# Altium PCB EST_MainV20.PcbDoc (part 3 of 7)
Units mil, origin at the board's own origin, x right, y up, seen from the top; angles counter-clockwise.
Board outline 2745 x 4540 mil, 2 copper layers (Top Layer, Bottom Layer); 326 components, 241 nets, 1052 pads, 399 vias.
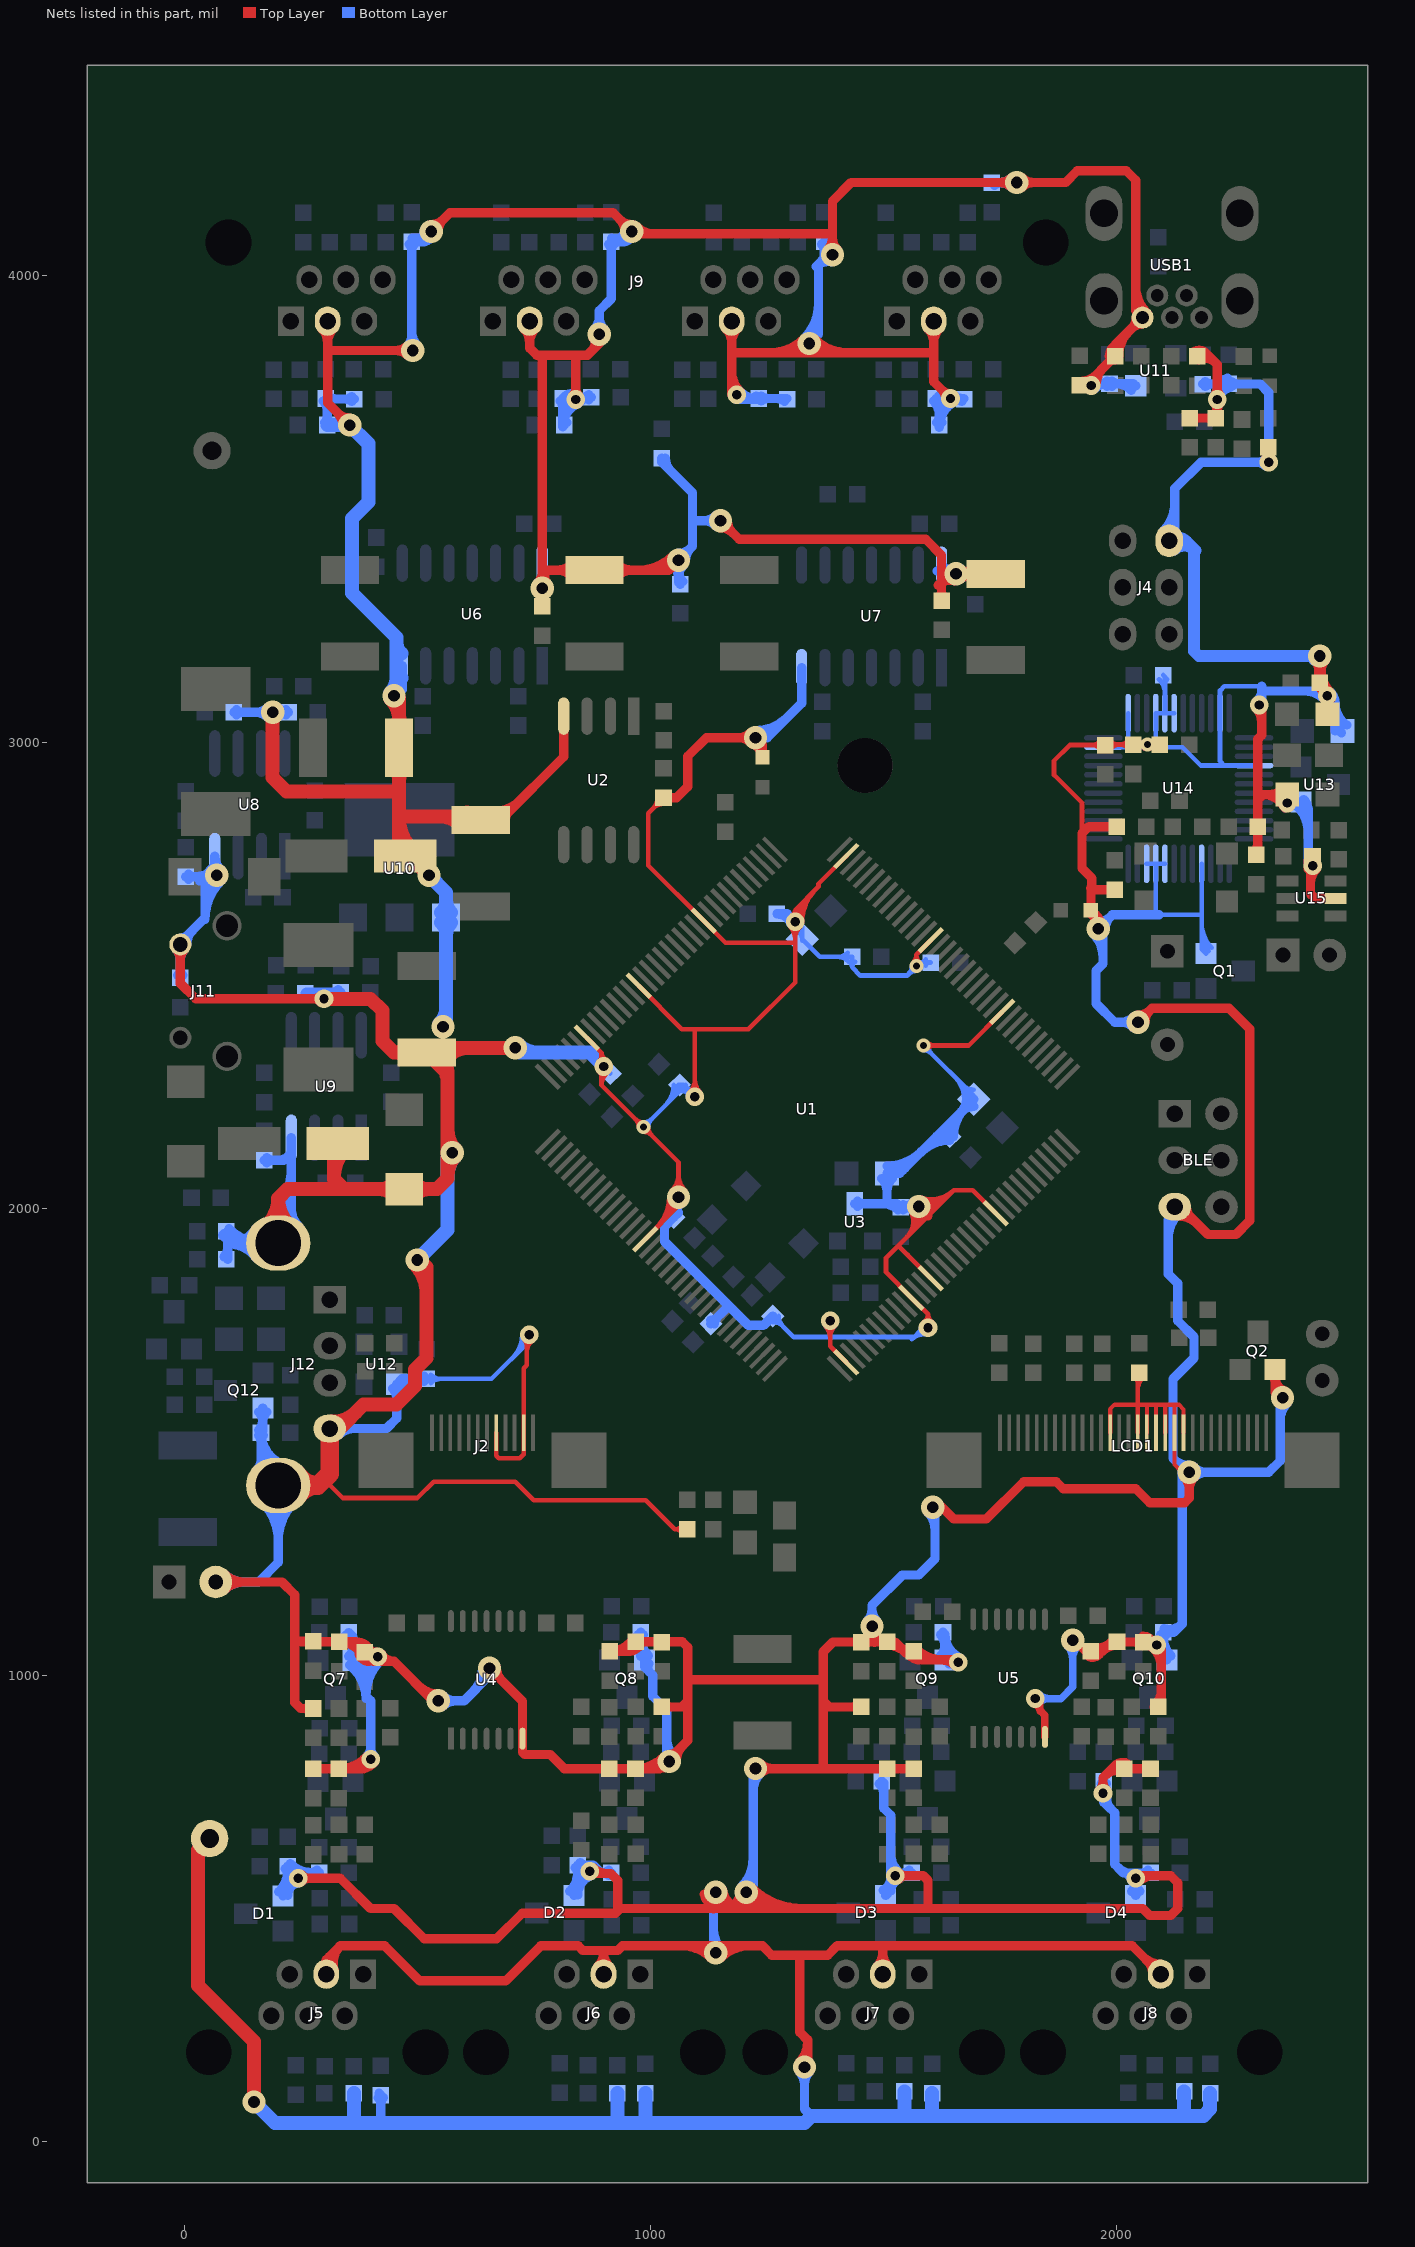
[diagram p3: the nets of this part, all layers, seen from the top]

## Via types
v1: diameter 30, hole 15, Top Layer to Bottom Layer, 237 vias
v2: diameter 50, hole 25, Top Layer to Bottom Layer, 93 vias
v3: diameter 40, hole 20, Top Layer to Bottom Layer, 68 vias
v4: diameter 60, hole 25, Top Layer to Bottom Layer, 1 vias

## Nets (pads, with @x,y where several pads share a name; then routed paths per layer and width w, separated by ;. In a path a pad name is that pad's centre, name@x,y a point inside that pad or via, vN(x,y) a via of type N, cw(c..) or ccw(c..) an arc to the next point about the centre after c; other vN are vias at no path point) (continued)
GND: BLE.5 C5.1 C6.1 C7.1 C8.1 C9.2 C10.1 C11.1 C12.1 C15.2 C16.2 C17.2 C18.2 C19.2 C20.2 C21.2 C22.2 C23.2 C24.2 C25.2 C26.2 C27.2 C28.2 C29.2 C30.2 C31.1 C32.1 C33.1 C34.1 C35.1 C36.1 C37.1 C38.1 C39.2 C40.1 C41.1 C42.1 C43.1 C44.1 C45.1 C46.1 C47.2 C48.1 C49.1 C50.1 C51.1 C52.1 C53.1 C54.1 C57.2 C58.2 C61.1 C62.1 C63.2 C64.1 C65.2 C66.1 C67.1 C68.2 C69.1 C70.2 C71.1 C72.1 C73.2 C74.1 C75.1 C76.1 C77.1 C78.1 C79.1 C80.1 C81.1 C83.2 C84.2 C85.2 D1.1 D2.1 D3.1 D4.1 D6.1 D12.2 D13.2 E1.2 E2.2 E3.2 E4.2 E5.2 E6.2 E7.2 J2.2 J2.5 J4.2 J5.3 J6.3 J7.3 J8.3 J9.3 J9.9 J9.15 J9.21 J10.2 J11.2 J12.4 J12.5 J12.6 LCD1.10 LCD1.11 LCD1.12 LCD1.13 LCD1.14 LCD1.15 LCD1.18 pad.1 Q1.1 Q2.1 Q7.1 Q8.1 Q9.1 Q10.1 Q12.1 R9.1 R10.1 R11.1 R41.1 R42.1 R43.1 R44.1 R45.1 R46.1 R47.1 R48.1 R57.2 R58.2 R59.2 R60.2 R85.2 R87.2 R89.2 R91.2 R93.2 R94.2 R95.2 R96.2 R102.1 R104.1 R120.1 R122.1 R139.1 R140.1 R141.2 R142.2 R143.2 R145.2 R149.1 R151.1 R158.1 R159.1 R160.1 R167.2 U1.16 U1.38 U1.48 U1.51 U1.61 U1.83 U1.94 U1.107 U1.120 U1.130 U1.138 U2.4 U3.2 U4.7 U5.7 U6.7 U6.14 U7.7 U7.14 U8.4 U9.4 U10.1 U11.1 U12.1 U13.2 U14.4 U14.16 U14.20 U14.21 U14.22 U14.35 U14.37 U14.40 U14.41 U14.42 U14.47 U15.2 USB1.5 | length 67974.3
  Top Layer w9: LCD1.18@1985.35,1520 1985.35,1570.35 1995,1580 2044.41,1580 ; C5.1@2038.5,1639.54 cw(c2024.22,1625.26) 2044.41,1625.26 ; LCD1.15@2044.41,1520 2044.41,1580 ; 2044.41,1608.69 cw(c2088.04,1608.69) C5.1@2057.19,1639.54 ; 2044.41,1630.41 cw(c2066.31,1630.41) C5.1@2050.82,1645.9 ; C5.1@2047.84,1648.88 2044.41,1645.45 2044.41,1580 ; LCD1.14@2064.09,1520 2064.09,1579.09 ; LCD1.13@2083.78,1520 2083.78,1578.78 ; LCD1.12@2103.46,1520 2103.46,1578.46 ; 2123.15,1576.85 LCD1.11@2123.15,1520 2123.15,1451.85 v2@2140,1435 ; LCD1.10@2142.83,1520 2142.83,1570 2132.83,1580 2044.41,1580
  Top Layer w10: 312.2,1432.2 312.2,1407.8 340,1380 500,1380 535,1415 710,1415 750,1375 990,1375 1052,1313 ; J2.5@669.26,1520 669.26,1470.74 675,1465 720,1465 728.32,1473.31 J2.2@728.32,1520 728.32,1658.31 735,1665 735,1695 ; v3@735,1720 735,1695 ; v3(740,1730) 735,1725 735,1695 ; U1.138@863.25,2366.48 895,2334.73 ; v3@889.39,2294.39 cw(c875.86,2280.86) 895,2280.86 ; v3@889.39,2315.61 ccw(c875.86,2329.14) 895,2329.14 ; 895,2264.69 cw(c930.62,2264.69) v3@909.07,2293.06 ; 895,2284.85 cw(c915.31,2284.85) v3@903.02,2301.02 ; v3@905.65,2318.89 cw(c912.09,2334.73) 895,2334.73 ; U1.130@974.6,2477.83 1067.44,2385 1095,2385 ; v1@975,2175 ccw(c950.86,2175) 967.93,2192.07 ccw(c985,2209.14) v1@985,2185 ; v1@985,2165 cw(c985,2140.86) 1002.07,2157.93 cw(c1019.14,2175) v1@995,2175 ; U1.16@988.52,1934.98 1060,2006.45 v2(1060,2025) ; U1.16@1012.74,1959.19 ccw(c946.94,2025) v2@1040,2025 ; C11.1@1015.13,2880.88 cw(c984.43,2880.88) 1006.13,2859.17 cw(c1027.84,2837.47) C11.1@1027.84,2868.17 ; C11.1@1027.84,2880.88 995,2848.04 995,2735.82 U1.120@1113.8,2617.03 1160.82,2570 1310,2570 ; 1029.81,1976.26 ccw(c981.08,2025) v2@1050,2025 ; v2@1045.86,2039.14 ccw(c1011.72,2073.28) 1060,2073.28 ccw(c1108.28,2073.28) v2@1074.14,2039.14 ; 1046.88,1993.34 ccw(c1015.22,2025) v2(1060,2025) ; R10.1@1069.22,1304.9 ccw(c1052,1290.66) 1052,1313 ; R10.1@1069.22,1321.1 cw(c1052,1335.34) 1052,1313 ; R10.1@1079.02,1313 1052,1313 ; v3@1084.39,2250.61 ccw(c1058.79,2276.21) 1095,2276.21 ccw(c1131.21,2276.21) v3@1105.61,2250.61 ; v3(1095,2240) 1095,2385 ; v3@1299.39,2604.39 cw(c1273.79,2578.79) 1310,2578.79 cw(c1346.21,2578.79) v3@1320.61,2604.39 ; v3@1302.94,2628.24 ccw(c1296.67,2640) 1310,2640 ; v3@1305,2615 cw(c1353.28,2615) 1319.14,2649.14 ; v3@1315,2615 cw(c1387.43,2615) 1336.21,2666.21 ; v3@1317.06,2628.24 cw(c1323.33,2640) 1310,2640 ; v3@1325,2615 cw(c1421.57,2615) 1353.28,2683.28 ; v3@1374.39,1749.39 cw(c1348.79,1723.79) 1385,1723.79 cw(c1421.21,1723.79) v3@1395.61,1749.39 ; 1385,1725 1385,1705.53 ; v3(1385,1760) 1385,1705.53 ; U1.38@1420.03,1670.51 1385,1705.53 ; U1.107@1420.03,2756.22 1360,2696.19 1360,2690 1310,2640 ; 1549.96,1939.96 ccw(c1517.32,1972.6) v2@1557.56,1995.2 ; 1550,1902.44 1556.22,1896.22 ; 1559.29,1949.29 ccw(c1529.27,1979.31) v2@1566.28,2000.1 ; v1@1562.93,2527.07 ccw(c1545.86,2544.14) 1570,2544.14 ccw(c1594.14,2544.14) v1@1577.07,2527.07 ; 1565.4,1976.58 ccw(c1574.01,2002.08) 1593.05,1983.05 ; 1568.62,1958.62 ccw(c1541.21,1986.02) v2(1575,2005) ccw(c1591.27,2053.17) 1627.22,2017.22 ; v2@1568.6,1986.05 ccw(c1579.76,2019.11) 1604.44,1994.44 ; v1(1570,2520) 1570,2544.29 U1.94@1600.98,2575.27 ; v2@1571.8,1995.53 ccw(c1585.52,2036.14) 1615.83,2005.83 ; 1577.94,1967.94 ccw(c1553.16,1992.73) v2@1583.72,2009.9 ; v2@1578.2,2014.47 ccw(c1597.02,2070.19) 1638.61,2028.61 ; v2@1581.4,2023.95 ccw(c1602.77,2087.22) 1650,2040 ; v1(1585,2350) 1681.94,2350 U1.83@1754.09,2422.15 ; v3@1586.36,1757.26 ccw(c1574.62,1773.92) 1595,1773.92 ; 1587.27,1977.27 ccw(c1565.1,1999.44) v2@1592.44,2014.8 ; v1@1592.07,2342.93 cw(c1609.14,2325.86) 1609.14,2350 cw(c1609.14,2374.14) v1@1592.07,2357.07 ; v3@1595,1755 1595,1773.92 ; 1596.6,1986.6 ccw(c1577.05,2006.15) 1601.15,2019.69 ; U1.51@1600.98,1851.46 1556.22,1896.22 ; v3@1603.64,1757.26 cw(c1615.38,1773.92) 1595,1773.92 ; 1665,2040 1690.82,2040 ; U1.61@1740.17,1990.65 1690.82,2040 ; 1925,2805 1925,2870 1865,2930 1865,2960 1899.12,2994.12 C75.1@1975.16,2994.12 1976.2,2995.16 C81.1@2091.88,2995.16 ; C75.1@1966.17,2985.13 ccw(c1944.46,2963.42) 1944.46,2994.12 ccw(c1944.46,3024.82) C75.1@1966.17,3003.11 ; C75.1@1984.15,2985.13 cw(c2008.37,2960.91) 2008.37,2995.16 ; C75.1@1984.15,3003.11 ccw(c2003.35,3022.31) 2003.35,2995.16 ; 2003.92,2995.16 cw(c2003.92,2963.89) R167.2@2026.02,2986 ; 2004.71,2995.16 ccw(c2004.71,3025.29) R167.2@2026.02,3003.98 ; R167.2@2040.48,2995.16 cw(c2040.48,2970.48) v1@2057.93,2987.93 ; R167.2@2041.24,2995.16 ccw(c2041.24,3018.76) v1@2057.93,3002.07 ; R167.2@2044.01,2986 cw(c2066.11,2963.89) v1@2066.11,2995.16 ; R167.2@2044.01,3003.98 ccw(c2065.32,3025.29) v1@2065.32,2995.16 ; v1@2072.07,2987.93 cw(c2089.52,2970.48) C81.1@2089.52,2995.16 ; v1@2072.07,3002.07 ccw(c2088.76,3018.76) C81.1@2088.76,2995.16 ; C81.1@2082.89,2986.17 ccw(c2061.18,2964.46) 2061.18,2995.16 ccw(c2061.18,3025.86) C81.1@2082.89,3004.15 ; 895,2334.73 895,2265 v1(985,2175) 1060,2100 v2(1060,2025) ; 1095,2385 1210,2385 1310,2485 1310,2570 ; 1310,2570 v3(1310,2615) 1310,2640 ; 1529.96,1919.96 1505,1895 1505,1863.92 U1.48@1559.22,1809.7 1595,1773.92 ; 1529.96,1919.96 1595,1985 1650,2040 ; 1529.96,1919.96 1532.48,1919.96 1556.22,1896.22 ; 1650,2040 1690.82,2040 ; v3@729.39,1719.39 cw(c715.86,1705.86) 735,1705.86 ccw(c715.86,1705.86) v3@729.39,1719.39 ; 735,1694.65 cw(c761.25,1694.65) 747.73,1717.14 ccw(c761.25,1694.65) 735,1694.65
  Top Layer w16: v3@1822.61,938.24 cw(c1819.52,923.07) 1835,923.07 ; v3@1835,950 1835,925 1845.54,914.46 U5.7@1845.54,868 ; v3@1835.31,943.86 ccw(c1850.75,934.66) 1838.04,921.96 ; v2(1905,1075) 1907.24,1075 C31.1@1931.12,1051.12 ; v2@1913.76,1068.48 ccw(c1934.88,1089.6) C31.1@1941.88,1060.56 ; C31.1@1931.12,1051.12 C31.1@1944.16,1051.12 C31.1@1931.12,1051.12
  Top Layer w20: J11.2@-17.43,2557.09 cw(c-40.68,2533.83) -7.8,2533.83 cw(c25.09,2533.83) J11.2@1.84,2557.09 ; J11.2@-7.8,2566.72 -7.8,2482.8 25,2450 v3(300,2450) ; J10.2@68,1200 210,1200 237.2,1172.8 237.2,1070 ; J10.2@85.68,1182.32 cw(c128.36,1139.64) 128.36,1200 cw(c128.36,1260.36) J10.2@85.68,1217.68 ; v3(245,565) 335,565 400,500 450,500 515,435 670,435 725,490 925,490 935,500 ; 251.84,1071.84 C36.1@332.36,1071.84 ; v3@252.07,557.93 cw(c269.14,540.86) 269.14,565 cw(c269.14,589.14) v3@252.07,572.07 ; 256.48,1071.84 ccw(c256.48,1093.45) 271.76,1078.17 cw(c258.59,1091.34) 258.59,1072.71 cw(c258.59,1054.08) R94.2@271.76,1067.26 ; R87.2@271.76,923.26 ccw(c258.59,910.08) 258.59,928.71 ccw(c258.59,947.34) R87.2@271.76,934.17 ; C24.2@277.03,799.6 C23.2@332.03,799.6 ; R87.2@277.22,928.71 250.21,928.71 237.2,941.72 237.2,1070 ; R94.2@277.22,1072.71 239.92,1072.71 237.2,1070 ; C24.2@282.49,794.14 cw(c295.66,780.97) 295.66,799.6 cw(c295.66,818.22) C24.2@282.49,805.05 ; R94.2@282.68,1078.17 ccw(c297.96,1093.45) 297.96,1071.84 ; v3@292.93,2442.93 ccw(c275.86,2425.86) 275.86,2450 ccw(c275.86,2474.14) v3@292.93,2457.07 ; J9.3@295.42,3886.63 cw(c265.44,3856.65) 307.83,3856.65 cw(c350.23,3856.65) J9.3@320.25,3886.63 ; J5.3@302.62,362.45 cw(c335.31,372.1) 311.21,396.21 ; J5.3@304.96,359.2 304.96,389.96 335,420 ; J9.3@307.83,3902.98 307.83,3840 ; J5.3@321.8,368.11 cw(c372.04,382.95) 335,420 ; C23.2@326.57,794.14 ccw(c313.4,780.97) 313.4,799.6 ccw(c313.4,818.22) C23.2@326.57,805.05 ; C36.1@326.9,1066.38 ccw(c313.73,1053.21) 313.73,1071.84 ccw(c313.73,1090.47) C36.1@326.9,1077.29 ; C23.2@337.49,794.14 cw(c350.66,780.97) 350.66,799.6 cw(c350.66,818.22) C23.2@337.49,805.05 ; C36.1@337.82,1066.38 cw(c350.99,1053.21) 350.99,1071.84 cw(c350.99,1090.47) C36.1@337.82,1077.29 ; v2@340,3680 ccw(c303.79,3680) 329.39,3705.61 ccw(c355,3731.21) v2@355,3695 ; v2(355,3680) 307.83,3727.17 307.83,3840 ; 368.16,1071.84 cw(c368.16,1037.03) C32.1@397.81,1055.28 ; C32.1@373.76,1062.43 ccw(c405.68,1094.35) v3@413.31,1049.86 ; C32.1@375.77,1044.71 ccw(c396.64,1052.15) 396.64,1030 ; 376.74,799.6 ccw(c376.74,840.79) v3@407.46,813.34 ; C32.1@379.63,1048.84 ccw(c361,1048.84) 374.17,1062.01 ccw(c387.35,1075.18) C32.1@387.35,1056.55 ; C32.1@380.77,1044.79 ccw(c332.36,1014.99) C36.1@332.36,1071.84 ; C32.1@387.35,1041.12 cw(c387.35,1022.49) 400.52,1035.67 cw(c413.69,1048.84) C32.1@395.06,1048.84 ; v3@392.54,826.66 cw(c332.04,880.76) C23.2@332.03,799.6 ; C32.1@394.61,1051.43 ccw(c425,1062.26) v3@425,1030 ; v3(400,820) 405,820 384.6,799.6 C23.2@332.03,799.6 ; v3@423.62,1045.08 ccw(c450,1060.62) 450,1030 ; v2@479.39,3829.39 ccw(c453.79,3803.79) 453.79,3840 ccw(c453.79,3876.21) v2@479.39,3850.61 ; v2(490,3840) 307.83,3840 ; 502.32,977.68 ccw(c545,1020.36) v2@545,960 ; v2(530,4095) 570,4135 920,4135 v2(960,4095) 965,4090 1390,4090 ; v2@530,4110 ccw(c530,4146.21) 555.61,4120.61 ccw(c581.21,4095) v2@545,4095 ; v2(545,945) 535,945 450,1030 ; E7.2@616,2841 686,2841 814,2969 U2.4@814,3056 ; v2@655,1000 cw(c655,963.79) 680.61,989.39 cw(c706.21,1015) v2@670,1015 ; v2(655,1015) 725.54,944.46 U4.7@725.54,864 725.54,835 730.54,830 785,830 815.12,799.88 C26.2@911.84,799.88 C25.2@967.84,799.88 ; E7.2@668.5,2853 ccw(c668.5,2924.22) 718.86,2873.86 ; E7.2@688.5,2833 cw(c713.85,2833) E7.2@695.92,2850.92 ; J9.9@728.49,3886.63 cw(c698.51,3856.65) 740.9,3856.65 cw(c783.3,3856.65) J9.9@753.32,3886.63 ; J9.9@740.9,3902.98 740.9,3845 755.9,3830 865,3830 890,3855 v2(890,3875) ; v2@757.24,3340.61 ccw(c731.63,3366.21) 767.84,3366.21 ccw(c804.06,3366.21) v2@778.45,3340.61 ; C39.2@762.39,3297.33 ccw(c749.21,3310.5) 767.84,3310.5 ccw(c786.47,3310.5) C39.2@773.3,3297.33 ; C39.2@767.84,3307.88 v2(767.84,3330) 767.84,3357.84 ; 767.84,3827.84 767.84,3357.84 ; v2@778.68,3340.37 cw(c793.48,3354.52) 779,3369 ; v3@832.93,3742.07 ccw(c815.86,3759.14) 840,3759.14 ccw(c864.14,3759.14) v3@847.07,3742.07 ; E1.2@833.36,3354.86 ccw(c799.22,3320.72) 799.22,3369 ccw(c799.22,3417.28) E1.2@833.36,3383.14 ; v3(840,3735) 840,3825 ; v3@875,575 915,575 930,560 930,500 935,500 ; 875,3840 ccw(c860.14,3854.86) v2@877.56,3866.61 ; v3@877.07,587.07 ccw(c906.21,616.21) 906.21,575 ; J6.3@887.03,375.55 ccw(c857.06,405.53) 899.45,405.53 ccw(c941.84,405.53) J6.3@911.86,375.55 ; J6.3@899.45,359.2 899.45,410 ; C26.2@906.39,794.42 ccw(c893.21,781.25) 893.21,799.88 ccw(c893.21,818.5) C26.2@906.39,805.33 ; C26.2@917.3,794.42 cw(c930.47,781.25) 930.47,799.88 cw(c930.47,818.5) C26.2@917.3,805.33 ; C33.1@917.61,1045.66 cw(c930.79,1032.49) 930.79,1051.12 cw(c930.79,1069.75) C33.1@917.61,1056.57 ; E1.2@926.64,3354.86 cw(c960.78,3320.72) 960.78,3369 cw(c960.78,3417.28) E1.2@926.64,3383.14 ; v2@945,4095 ccw(c908.79,4095) 934.39,4120.61 ccw(c960,4146.21) v2@960,4110 ; 951.23,1051.12 ccw(c951.23,1084.09) R95.2@977.98,1064.81 ; R95.2@960.3,1071.99 cw(c941.67,1071.99) 954.84,1058.82 cw(c968.02,1045.65) R95.2@968.02,1064.28 ; R95.2@961.76,1076.5 cw(c912.16,1112.26) C33.1@912.16,1051.12 947.14,1051.12 R95.2@968.02,1071.99 1068.01,1071.99 1080,1060 1080,990 ; C25.2@962.39,794.42 ccw(c949.21,781.25) 949.21,799.88 ccw(c949.21,818.5) C25.2@962.39,805.33 ; v2@970.61,4105.61 ccw(c1008.28,4143.28) 1008.28,4090 ; 973.09,3369 ccw(c973.09,3476.91) v2@1049.39,3400.61 ; C25.2@973.3,794.42 cw(c986.47,781.25) 986.47,799.88 cw(c986.47,818.5) C25.2@973.3,805.33 ; R95.2@973.47,1066.54 cw(c986.65,1053.36) 986.65,1071.99 cw(c986.65,1090.62) R95.2@973.47,1077.45 ; 1003.42,1071.99 cw(c1003.42,1050.38) C37.1@1018.7,1065.66 ; 1015.75,799.88 ccw(c1015.75,838.98) v2@1043.56,811.48 ; 1021.37,3369 ccw(c1021.37,3428.63) v2@1063.54,3386.46 ; R89.2@1024.02,931.99 1066.99,931.99 1080,945 ; C11.1@1027.84,2880.88 1055.88,2880.88 1080,2905 1080,2970 1120,3010 v2(1225,3010) 1240.1,2994.9 D12.2@1240.1,2968.14 ; v2@1029.33,825.55 cw(c967.85,886.34) C25.2@967.84,799.88 ; R89.2@1029.47,926.54 cw(c1042.65,913.36) 1042.65,931.99 cw(c1042.65,950.62) R89.2@1029.47,937.45 ; C37.1@1029.61,1065.66 cw(c1044.9,1050.38) 1044.9,1071.99 ; C11.1@1033.3,2875.43 cw(c1046.47,2862.25) 1046.47,2880.88 cw(c1046.47,2899.51) C11.1@1033.3,2886.34 ; v2@1040,830 ccw(c1040,854.14) 1057.07,837.07 ; v2@1055,815 cw(c1103.28,815) 1069.14,849.14 ; v2(1060,3390) 1039,3369 E1.2@880,3369 779,3369 ; 1067.57,420 cw(c1067.57,332.57) v2@1129.39,394.39 ; 1115.41,530.49 ccw(c1152,537.2) 1152,500 ; 1115.86,420 cw(c1115.86,380.86) v2@1143.54,408.54 ; 1135,499.65 cw(c1161.25,499.65) v2@1147.73,522.14 ; v2@1135,535 1135,500 ; v2@1135.08,534.1 ccw(c1176,541.6) 1176,500 ; v2@1136.46,408.54 cw(c1164.14,380.86) 1164.14,420 ; v2@1150,3460 cw(c1150,3423.79) 1175.61,3449.39 cw(c1201.21,3475) v2@1165,3475 ; v2(1150,3475) 1190,3435 1590,3435 1623.84,3401.16 1623.84,3343.84 ; v2@1150.61,394.39 cw(c1212.43,332.57) 1212.43,420 ; v2@1154.75,537.7 ccw(c1200,546) 1200,500 ; J9.15@1161.56,3886.63 cw(c1131.58,3856.65) 1173.98,3856.65 cw(c1216.37,3856.65) J9.15@1186.39,3886.63 ; 1173.98,3795.76 ccw(c1235.76,3795.76) v3@1192.07,3752.07 ; J9.15@1173.98,3902.98 1173.98,3835 ; v3@1180,3740 1173.98,3746.02 1173.98,3835 ; 1187.32,517.32 ccw(c1229.14,559.14) 1229.14,500 ; v2@1196,523 cw(c1182.5,505) 1205,505 ; v2@1201.46,531.46 ccw(c1277.43,607.43) 1277.43,500 ; v2(1205,535) 1205,505 ; v2@1214,523 ccw(c1227.5,505) 1205,505 ; v2@1214.39,2999.39 ccw(c1188.79,2973.79) 1188.79,3010 ccw(c1188.79,3046.21) v2@1214.39,3020.61 ; v2@1215.61,545.61 ccw(c1325.71,655.71) 1325.71,500 ; v2@1219.42,2996.08 cw(c1207.15,2965.5) D12.2@1240.1,2965.5 ; v2(1225,800) 1225.12,799.88 1370,799.88 ; v2@1235.61,789.39 cw(c1260.91,764.09) 1260.91,799.88 ; v2@1235.61,810.61 ccw(c1261.52,836.52) 1261.52,799.88 ; 1255.5,3835 ccw(c1255.5,3939.5) v2@1329.39,3865.61 ; 1303.79,3835 ccw(c1303.79,3891.21) v2@1343.54,3851.46 ; v2@1319.39,170.61 ccw(c1277.5,212.5) 1336.74,212.5 ; v2@1336.46,3851.46 ccw(c1376.21,3891.21) 1376.21,3835 ; v2@1336.74,160 1336.74,218.26 1320,235 1320,400 ; v2(1340,3855) 1320,3835 ; v2@1350.61,3865.61 ccw(c1424.5,3939.5) 1424.5,3835 ; v2@1379.39,4055.61 ccw(c1353.79,4081.21) 1390,4081.21 ccw(c1426.21,4081.21) v2@1400.61,4055.61 ; v2(1390,4045) 1390,4090 ; R91.2@1446.56,926.54 ccw(c1433.39,913.36) 1433.39,931.99 ccw(c1433.39,950.62) R91.2@1446.56,937.45 ; C38.1@1446.7,1065.66 ccw(c1433.53,1052.49) 1433.53,1071.12 ccw(c1433.53,1089.75) C38.1@1446.7,1076.57 ; R91.2@1452.02,931.99 1383.01,931.99 1370,945 ; C38.1@1457.61,1065.66 cw(c1470.79,1052.49) 1470.79,1071.12 cw(c1470.79,1089.75) C38.1@1457.61,1076.57 ; v2@1467.63,1091.94 cw(c1455.68,1070.75) 1480,1070.75 ; v2@1480,1110 1480,1071.12 ; J7.3@1485.46,375.55 ccw(c1455.48,405.53) 1497.87,405.53 ccw(c1540.27,405.53) J7.3@1510.29,375.55 ; 1487.28,1071.12 ccw(c1487.28,1092.73) R96.2@1502.56,1077.45 ; J7.3@1497.87,359.2 1497.87,417.13 ; C28.2@1502.39,794.42 ccw(c1489.21,781.25) 1489.21,799.88 ccw(c1489.21,818.5) C28.2@1502.39,805.33 ; R96.2@1508.02,1064.28 cw(c1508.02,1009.45) C34.1@1546.78,1048.22 ; C28.2@1513.3,794.42 cw(c1526.47,781.25) 1526.47,799.88 cw(c1526.47,818.5) C28.2@1513.3,805.33 ; v3(1525,570) 1585,570 1595,560 1595,500 ; v3@1532.07,562.93 cw(c1549.14,545.86) 1549.14,570 cw(c1549.14,594.14) v3@1532.07,577.07 ; 1534.02,1060.98 ccw(c1549.19,1076.15) C34.1@1560.2,1057.74 ; C34.1@1555.47,1042.43 ccw(c1578.24,1065.2) 1578.24,1033 ; C27.2@1558.39,794.42 ccw(c1545.21,781.25) 1545.21,799.88 ccw(c1545.21,818.5) C27.2@1558.39,805.33 ; C34.1@1558.7,1045.66 ccw(c1545.53,1032.49) 1545.53,1051.12 ccw(c1545.53,1069.75) C34.1@1558.7,1056.57 ; C27.2@1563.84,799.88 C28.2@1507.84,799.88 1370,799.88 ; C34.1@1564.16,1043.4 cw(c1564.16,1024.77) 1577.33,1037.95 cw(c1590.5,1051.12) C34.1@1571.87,1051.12 ; C34.1@1569.61,1056.57 ccw(c1626.53,1113.49) 1626.53,1033 ; v2(1575,2005) 1595,1985 ; J9.21@1594.63,3886.63 cw(c1564.65,3856.65) 1607.05,3856.65 cw(c1649.44,3856.65) J9.21@1619.46,3886.63 ; v2(1605,1360) 1625,1360 1650,1335 1720,1335 1800,1415 1870,1415 1885,1400 2040,1400 2070,1370 2145,1370 2155,1380 v2(2155,1435) ; J9.21@1607.05,3902.98 1607.05,3840 ; 1616.84,3336.84 cw(c1642.61,3311.08) v2@1651.39,3346.44 ; C47.2@1618.39,3309.33 ccw(c1605.21,3322.5) 1623.84,3322.5 ccw(c1642.47,3322.5) C47.2@1629.3,3309.33 ; 1623.79,1033 cw(c1623.79,991.79) v3@1652.93,1020.93 ; C47.2@1623.84,3303.88 1623.84,3343.84 ; v3@1633,3737 ccw(c1608.86,3737) 1625.93,3754.07 ccw(c1643,3771.14) v3@1643,3747 ; v3(1643,3737) 1607.05,3772.95 1607.05,3840 ; v3@1665,1033 1582.28,1033 1570.28,1045 C34.1@1564.16,1051.12 1543.88,1051.12 1523.88,1071.12 1480,1071.12 ; v2@1665.61,3350.39 cw(c1691.21,3324.79) 1691.21,3361 cw(c1691.21,3397.21) v2@1665.61,3371.61 ; E2.2@1693.36,3346.86 ccw(c1659.22,3312.72) 1659.22,3361 ccw(c1659.22,3409.28) E2.2@1693.36,3375.14 ; E2.2@1740,3361 v2(1655,3361) 1641,3361 1623.84,3343.84 ; v2@1774.39,4189.39 ccw(c1748.79,4163.79) 1748.79,4200 ccw(c1748.79,4236.21) v2@1774.39,4210.61 ; v2@1795.61,4189.39 cw(c1821.21,4163.79) 1821.21,4200 cw(c1821.21,4236.21) v2@1795.61,4210.61 ; C67.1@1919.84,3773.33 ccw(c1919.84,3825.13) 1956.47,3788.5 ; C67.1@1922.34,3765.61 ccw(c1922.34,3787.66) v3@1937.93,3772.07 ; v3@1937.84,3758.02 ccw(c1919.84,3740.5) C67.1@1919.84,3765.61 1933.58,3765.61 C65.2@1995.84,3827.88 1995.84,3851.46 USB1.5@2054.88,3910.5 2040,3925.38 2040,4205 2020,4225 1915,4225 1890,4200 v2(1785,4200) 1430,4200 1390,4160 1390,4090 ; D13.2@1940.82,2635.52 cw(c1911.66,2596.96) v2@1960,2596.96 ; C31.1@1941.56,1039.11 ccw(c1946.32,1061.1) 1962.23,1045.19 ; 1943.12,2686.88 1944.14,2685.86 ; D13.2@1943.87,2634.41 cw(c1943.04,2617.47) v2@1960,2617.47 ; C31.1@1944.16,1051.12 1968.16,1051.12 R93.2@1988.16,1071.12 ; 1944.14,2687.9 1944.14,2685.86 ; C31.1@1945.79,1058.66 ccw(c1955.56,1103.72) R93.2@1988.16,1071.12 ; C31.1@1949.61,1045.66 cw(c1962.79,1032.49) 1962.79,1051.12 cw(c1962.79,1069.75) C31.1@1949.61,1056.57 ; v3@1955,3765 cw(c2008.19,3765) 1970.58,3802.61 ; D13.2@1957.06,2626.98 cw(c1936.08,2606.01) v2@1964.85,2598.78 ; v2(1960,2600) 1960,2624.04 D13.2@1944.14,2639.9 1944.14,2685.86 ; v3@1962.93,754.06 ccw(c1945.86,771.13) 1970,771.13 ccw(c1994.14,771.13) v3@1977.07,754.06 ; 1968.09,1051.05 cw(c2000.02,1019.13) R93.2@2000.02,1064.28 ; v3@1970,741.98 1970,780 1989.88,799.88 C29.2@2015.84,799.88 C30.2@2071.84,799.88 ; 1976.89,786.89 cw(c1998.94,764.84) C29.2@2012.49,792.93 ; C65.2@1983.56,3827.88 cw(c2010.85,3827.88) 1991.55,3847.17 ; C65.2@1988.13,3827.88 cw(c1969.5,3827.88) 1982.67,3814.7 cw(c1995.84,3801.53) C65.2@1995.84,3820.16 ; C74.1@1989.39,2678.43 ccw(c1976.21,2665.25) 1976.21,2683.88 ccw(c1976.21,2702.51) C74.1@1989.39,2689.34 ; C65.2@1990.39,3833.33 ccw(c1977.21,3846.5) 1995.84,3846.5 ccw(c2014.47,3846.5) C65.2@2001.3,3833.33 ; 1992.48,802.48 cw(c2015.84,779.12) C29.2@2015.84,812.16 ; C76.1@1994.43,2813.7 ccw(c1981.25,2800.53) 1981.25,2819.16 ccw(c1981.25,2837.79) C76.1@1994.43,2824.61 ; C74.1@1994.84,2683.88 1946.12,2683.88 ; 1996.81,806.81 cw(c2011.9,791.71) C29.2@2021.18,810.94 ; C76.1@1999.88,2819.16 1939.16,2819.16 1925,2805 1925,2730 1946.12,2708.88 1946.12,2683.88 ; C65.2@2003.56,3827.88 cw(c2079.13,3827.88) 2025.69,3881.31 ; R93.2@2005.47,1077.45 ccw(c2020.76,1092.73) 2020.76,1071.12 ; C29.2@2010.39,794.42 ccw(c1997.21,781.25) 1997.21,799.88 ccw(c1997.21,818.5) C29.2@2010.39,805.33 ; C29.2@2021.3,794.42 cw(c2034.47,781.25) 2034.47,799.88 cw(c2034.47,818.5) C29.2@2021.3,805.33 ; 2040,3931.03 ccw(c2075.41,3931.03) USB1.5@2050.37,3905.99 ; 2040,3979.31 ccw(c2123.7,3979.31) USB1.5@2064.51,3920.13 ; USB1.5@2041.26,3910.5 cw(c2008.37,3910.5) 2031.63,3887.25 cw(c2054.88,3863.99) USB1.5@2054.88,3896.88 ; v2(2045,2400) 2075,2430 2240,2430 2284.65,2385.35 2284.65,1974.65 2255,1945 2195,1945 2136,2004 BLE.5@2124,2004 ; v2@2045,2415 ccw(c2045,2451.21) 2070.61,2425.61 ccw(c2096.21,2400) v2@2060,2400 ; v3@2045.13,570 2115,570 2130,555 2130,500 2115,485 2070,485 2055,500 1595,500 ; C35.1@2046.09,1071.12 cw(c2046.09,1026.09) v3@2077.93,1057.93 ; v3@2047.2,557.93 cw(c2076.34,528.79) 2076.34,570 ; C35.1@2050.7,1065.66 ccw(c2037.53,1052.49) 2037.53,1071.12 ccw(c2037.53,1089.75) C35.1@2050.7,1076.57 ; C35.1@2055.77,1083.4 cw(c2056.54,1059.14) C35.1@2073.7,1076.3 ; 2056.85,395.9 ccw(c2093.54,432.59) J8.3@2093.54,380.7 ; C35.1@2059.78,1064.31 cw(c2071.94,1041.45) v3@2090.24,1059.76 ; C35.1@2061.61,1065.66 cw(c2074.79,1052.49) 2074.79,1071.12 cw(c2074.79,1089.75) C35.1@2061.61,1076.57 ; 2066.35,386.39 cw(c2043.1,363.14) J8.3@2075.98,363.14 ; C30.2@2066.39,794.42 ccw(c2053.21,781.25) 2053.21,799.88 ccw(c2053.21,818.5) C30.2@2066.39,805.33 ; R85.2@2080.02,931.99 R85.2@2088.02,931.99 ; R85.2@2085.72,939.36 ccw(c2081.78,951.98) 2095,951.98 2095,1005 ; R85.2@2088.02,939.99 R85.2@2088.02,931.99 ; J8.3@2093.54,359.2 2032.74,420 1400,420 1380,400 1320,400 ; v3@2095,1050 2095,1015 ; BLE.5@2129.47,1984.47 cw(c2129.47,1921.57) 2173.95,1966.05 ; v2@2144.39,1424.39 cw(c2118.79,1398.79) 2155,1398.79 cw(c2191.21,1398.79) v2@2165.61,1424.39 ; BLE.5@2149,2004 ccw(c2180.38,2004) 2158.19,1981.81 ; C66.1@2156.16,3695.12 2211.87,3695.12 R151.1@2211.98,3695 2215,3698.02 v3(2215,3735) 2215,3810 2197.88,3827.12 C64.1@2172.16,3827.12 ; C66.1@2161.61,3689.66 cw(c2174.79,3676.49) 2174.79,3695.12 cw(c2174.79,3713.75) C66.1@2161.61,3700.57 ; C64.1@2166.79,3838.17 cw(c2175.99,3819.22) 2190.88,3834.12 ; C64.1@2171.88,3839.4 cw(c2172.59,3808.02) 2194.79,3830.21 ; C64.1@2175.53,3820.18 cw(c2188.98,3792.49) 2210.74,3814.26 ; C64.1@2177.61,3821.66 cw(c2190.79,3808.49) 2190.79,3827.12 cw(c2190.79,3845.75) C64.1@2177.61,3832.57 ; 2193.07,3695.12 cw(c2193.07,3676.09) R151.1@2206.53,3689.54 ; 2193.64,3695.12 ccw(c2193.64,3713.34) 2206.53,3700.46 ccw(c2186.07,3720.91) v3@2215,3720.91 ; v3@2207.93,3727.93 cw(c2190.86,3710.86) 2215,3710.86 cw(c2239.14,3710.86) v3@2222.07,3727.93 ; v3@2207.93,3742.07 ccw(c2190.86,3759.14) 2215,3759.14 ccw(c2239.14,3759.14) v3@2222.07,3742.07 ; C70.2@2293.39,2764.33 ccw(c2272.31,2785.41) 2302.12,2785.41 ; C77.1@2296.66,2813.39 cw(c2283.49,2800.21) 2302.12,2800.21 cw(c2320.75,2800.21) C77.1@2307.57,2813.39 ; C77.1@2296.66,2824.3 ccw(c2283.49,2837.47) 2302.12,2837.47 ccw(c2320.75,2837.47) C77.1@2307.57,2824.3 ; v3@2297.93,3072.93 cw(c2268.79,3043.79) 2310,3043.79 ; C70.2@2298.84,2758.88 2302.12,2762.15 C77.1@2302.12,2818.84 2302.12,2877.12 ; v3@2310,3075 2310,3015 2302.12,3007.12 2302.12,2877.12 ; v3@2317.93,3607.07 ccw(c2300.86,3624.14) 2325,3624.14 ccw(c2349.14,3624.14) v3@2332.07,3607.07 ; R145.2@2318.53,3626.55 cw(c2302.9,3610.93) v3@2325,3610.93 ; R145.2@2323.98,3632.01 2325,3630.99 v3(2325,3600) ; Q2.1@2330.16,1646.16 cw(c2308.82,1624.82) 2339,1624.82 cw(c2369.18,1624.82) Q2.1@2347.84,1646.16 ; v2@2350,1595 2339,1606 2339,1639 ccw(c2370.72,1639) v2@2360.05,1609.13 ; C71.1@2350.21,2887.94 cw(c2350.21,2860.19) C71.1@2373.33,2875.53 ; C71.1@2354.03,2876.91 ccw(c2327.42,2850.3) 2327.42,2887.94 ccw(c2327.42,2925.58) C71.1@2354.03,2898.96 ; C71.1@2356.67,2864.47 ccw(c2312.94,2835.46) 2312.94,2887.94 ; v3@2360,2860 2365.05,2865.06 C71.1@2365.05,2887.94 2312.94,2887.94 ; v3@2410,2728.44 cw(c2433,2728.44) C78.1@2422.61,2748.96 ; v3@2410,2730 v3@2410,2735 ; 2415,2698.79 cw(c2456.21,2698.79) v3@2427.07,2727.93 ; v3@2415,2727.27 cw(c2447.69,2727.27) C78.1@2424.57,2750.39 ; v3@2415,2729.68 cw(c2442.13,2729.68) C78.1@2424.21,2750.05 ; C78.1@2419.12,2755.84 2410,2746.73 v3@2410,2735 ; C80.1@2429.11,3133.85 cw(c2400.01,3104.75) v3@2440.99,3100.93 ; C80.1@2432.82,3120.48 cw(c2425.11,3095.82) v3@2450.95,3095.82 ; C80.1@2435.12,3127.84 2450.95,3112.02 v3(2450.95,3100) C72.1@2450.95,3060.06 ; C72.1@2439.92,3071.09 ccw(c2413.31,3097.7) 2450.95,3097.7 ccw(c2488.58,3097.7) C72.1@2461.97,3071.09 ; v3@2443.87,3092.93 cw(c2426.8,3075.86) 2450.95,3075.86 cw(c2475.09,3075.86) v3@2458.02,3092.93 ; U15.2@2468,2665.4 2424.6,2665.4 2415,2675 2415,2730 v3@2410,2735 ; C36.1@332.36,1071.84 364.35,1071.84 C32.1@387.35,1048.84 406.18,1030 v3@425,1030 ; 335,420 430,420 505,345 690,345 765,420 845,420 855,410 899.45,410 ; v3@425,1030 450,1030 ; 767.84,3357.84 779,3369 ; 899.45,410 930,410 940,420 1240,420 1260,400 1320,400 ; 935,500 1135,500 ; C25.2@967.84,799.88 1019.88,799.88 1045,825 1080,860 1080,945 ; 1080,945 1080,990 ; 1080,990 1370,990 ; 1135,500 1200,500 ; 1173.98,3835 1320,3835 ; 1200,500 1205,505 ; 1200,500 1595,500 ; 1320,3835 1602.05,3835 1607.05,3840 ; 1370,799.88 1370,945 ; 1370,945 1370,990 ; 1370,990 1370,1050 1391.12,1071.12 C38.1@1452.16,1071.12 1480,1071.12 ; 1944.14,2685.86 1946.12,2683.88 ; R93.2@1988.16,1071.12 C35.1@2056.16,1071.12 ; C35.1@2056.16,1071.12 cw(c2056.16,1047.25) 2076.48,1059.76 ccw(c2056.16,1047.25) C35.1@2056.16,1071.12 ; C35.1@2056.16,1071.12 2078.88,1071.12 2095,1055 2095,1015 ; v3@2077.93,1057.93 cw(c2036.72,1016.72) 2095,1016.72 ccw(c2036.72,1016.72) v3@2077.93,1057.93 ; R85.2@2088.02,931.99 2095,938.98 2095,1005 ; 2095,1005 2095,1015 ; 2302.12,2877.12 2312.94,2887.94 ; R85.2@2082.56,937.45 ccw(c2052.53,967.48) 2095,967.48 cw(c2052.53,967.48) R85.2@2082.56,937.45 ; v3@2410,2733.09 cw(c2426.07,2733.09) 2421.37,2748.46 ccw(c2426.07,2733.09) v3@2410,2733.09
  Top Layer w25: v2@2426.16,3176.16 cw(c2404.54,3154.54) 2435.12,3154.54 ; v2(2435,3185) 2435.12,3184.88 C80.1@2435.12,3127.84 ccw(c2455.9,3127.84) v3@2452.26,3107.38 ; 2435.12,3155.11 cw(c2464.89,3155.11) v2@2443.84,3176.16 ; 2435.12,3156.32 ccw(c2507.26,3156.32) v3@2456.25,3105.3
  Top Layer w30: pad.1@55,650 30,625 30,335 150,215 v2(150,85) ; J12.5@173.4,1960.1 ccw(c120.7,2021.96) 201.97,2021.96 ; v2(190,3064.16) 190,3000 190,2925 220,2895 461,2895 ; J12.5@201.97,1926.56 201.97,2021.97 ; J12.5@230.54,1960.1 cw(c283.24,2021.96) 201.97,2021.96 ; v3(300,2450) 400,2450 425,2425 425,2360 450,2335 E6.2@520,2335 ; J12.4@312.2,1528.92 333.92,1528.92 385,1580 455,1580 495,1620 495,1655 520,1680 520,1875 505,1890 v2(500,1890) ; J12.4@317.68,1543.45 ccw(c317.68,1617.75) 370.21,1565.21 ; 322,2071.36 cw(c398.64,2071.36) E4.2@344.45,2125.55 ; E4.2@322,2140 322,2063 343,2042 ; v2@442.93,3092.93 cw(c399.3,3049.3) E5.2@461,3049.3 ; E5.2@450.39,2944.89 cw(c424.79,2919.29) 461,2919.29 cw(c497.21,2919.29) E5.2@471.61,2944.89 ; E5.2@450.39,3031.11 ccw(c424.79,3056.71) 461,3056.71 ccw(c497.21,3056.71) E5.2@471.61,3031.11 ; D6.1@452.86,2027.86 ccw(c418.72,1993.72) 418.72,2042 ccw(c418.72,2090.28) D6.1@452.86,2056.14 ; v2@455,3100 461,3094 E5.2@461,2988 461,2895 ; E3.2@461,2763 461,2840 ; 461,2836.71 ccw(c554.71,2836.71) E3.2@488.45,2770.45 ; E3.2@474,2756 484,2756 v2(525,2715) ; E6.2@476.89,2324.39 ccw(c451.29,2298.79) 451.29,2335 ccw(c451.29,2371.21) E6.2@476.89,2345.61 ; D6.1@491.14,2027.86 cw(c525.28,1993.72) 525.28,2042 cw(c525.28,2090.28) D6.1@491.14,2056.14 ; v2@492.93,1882.93 cw(c427.57,1817.57) 520,1817.57 ; E6.2@541.89,2324.39 cw(c486.11,2268.61) 565,2268.61 ; E6.2@545.22,2321.88 cw(c526.59,2288.3) 565,2288.3 ; 547.97,2841 cw(c547.97,2777.47) E7.2@592.89,2822.39 ; E6.2@563.11,2324.39 cw(c612.86,2274.64) 612.86,2345 ; 565,2071.72 cw(c623.28,2071.72) v2@582.07,2112.93 ; 565,2168.28 ccw(c623.28,2168.28) v2@582.07,2127.07 ; v2(575,2120) v2@565,2120 ; E7.2@607,2850 616,2841 462,2841 461,2840 ; v2(710,2345) 530,2345 E6.2@520,2335 ; 201.97,2021.97 222,2042 343,2042 ; 343,2042 464,2042 D6.1@472,2042 542,2042 565,2065 v2@565,2120 ; 461,2840 461,2895 ; E6.2@520,2335 565,2290 v2@565,2120
  Top Layer w40: J12.6@201.97,1406.88 286.88,1406.88 ; J12.6@243.79,1384.46 cw(c286.87,1354.27) 286.87,1406.88 ; J12.6@243.79,1429.29 ccw(c286.87,1459.49) 286.87,1406.88 ; J12.4@312.2,1528.92 312.2,1432.2 286.88,1406.88
  Bottom Layer w10: C68.2@519.84,1635.39 659.1,1635.39 740,1716.29 v3(740,1730) ; C68.2@528.83,1626.4 cw(c550.54,1604.69) 550.54,1635.39 cw(c550.54,1666.09) C68.2@528.83,1644.38 ; 704.7,1680.99 ccw(c655.69,1730) v3@725,1730 ; 721.77,1698.06 ccw(c689.83,1730) v3@735,1730 ; v3@895,2310 v3(900,2305) 913.93,2291.07 R11.1@913.93,2289.91 ; v1(985,2175) 1062.43,2252.43 C84.2@1062.43,2265.35 C84.2@1069.65,2265.35 ; v1@985,2185 ccw(c985,2209.14) 1002.07,2192.07 ccw(c1019.14,2175) v1@995,2175 ; 1031.58,2221.58 ccw(c987.81,2265.35) C84.2@1049.71,2265.35 ; C6.1@1042.74,1992.41 ccw(c1020.61,2025) v2(1060,2025) C6.1@1060,1992.01 ; C6.1@1048.36,1984.14 ccw(c1033.43,2006.12) v2@1060,2006.12 ; 1048.65,2238.65 ccw(c1021.96,2265.35) C84.2@1059.71,2265.35 ; v2@1050.75,2007.27 cw(c1042.79,1992.01) C6.1@1060,1992.01 ; C84.2@1062.43,2252.63 cw(c1062.43,2204.5) v3@1096.47,2238.53 ; C84.2@1062.43,2262.63 cw(c1062.43,2238.64) 1079.39,2255.61 ; v2@1069.25,2007.27 ccw(c1077.21,1992.01) C6.1@1060,1992.01 ; C84.2@1075.14,2265.35 ccw(c1088.41,2265.35) 1079.03,2255.97 ; v3@1080,2240.11 ccw(c1044.67,2240.36) C84.2@1069.65,2265.35 ; v3@1094.89,2255 cw(c1094.64,2290.33) C84.2@1069.65,2265.35 ; v3(1095,2240) C84.2@1069.65,2265.35 ; C7.1@1262.11,1757.39 cw(c1262.11,1726.69) 1283.82,1748.4 cw(c1305.53,1770.11) C7.1@1274.83,1770.11 ; C7.1@1262.11,1770.11 1307.22,1725 1385,1725 ; v3@1305.92,2600.57 cw(c1298.56,2574.55) C10.1@1325.59,2574.55 ; v3@1308.64,2610.19 cw(c1302.3,2587.78) C10.1@1325.59,2587.78 ; v3(1310,2615) 1325.59,2599.41 C10.1@1325.59,2577.68 1363.11,2540.16 C83.2@1432.12,2540.16 1432.12,2517.88 ; v3@1311.36,2619.81 cw(c1306.04,2601) C10.1@1325.59,2601 ; v3@1374.66,1749.14 cw(c1351.67,1725) 1385,1725 ; v3(1385,1760) 1385,1725 ; v3@1395.34,1749.14 ccw(c1418.33,1725) 1385,1725 ; C83.2@1423.13,2531.17 ccw(c1401.42,2509.46) 1401.42,2540.16 ccw(c1401.42,2570.86) C83.2@1423.13,2549.15 ; 1560,1720 cw(c1586.03,1693.97) v3@1592.4,1730.23 ; v1@1560,2520 cw(c1535.86,2520) 1552.93,2502.93 cw(c1570,2485.86) v1@1570,2510 ; 1573.59,1733.59 cw(c1590.09,1717.09) v3@1594.13,1740.08 ; 1576.46,1736.46 ccw(c1567.93,1745) v3@1580,1745 ; v1@1578.66,2515.01 cw(c1600.88,2502.2) C62.1@1600.88,2527.84 v1@1577.84,2527.84 ; C62.1@1583.57,2527.84 ccw(c1583.57,2512.18) v1(1570,2520) ; v1@1585,2340 cw(c1585,2315.86) 1602.07,2332.93 cw(c1619.14,2350) v1@1595,2350 ; v1(1585,2350) 1693.08,2241.92 C9.2@1693.08,2234.83 ; C62.1@1590.12,2521.07 ccw(c1577.84,2513.33) v1@1577.84,2527.84 ; C62.1@1590.12,2534.62 cw(c1577.84,2542.35) v1@1577.84,2527.84 ; v3@1595,1755 1565,1725 1385,1725 ; 1652.91,2282.09 cw(c1605.66,2234.83) C9.2@1672.49,2234.83 ; 1670.03,2264.97 ccw(c1693.08,2288.02) C9.2@1693.08,2255.42 ; 1669.98,2265.02 cw(c1639.8,2234.83) C9.2@1682.49,2234.83 ; U14.35@1970.91,2989.57 v1@2065,2989.57 ; 2024.06,2990.52 U14.37@2024.06,3062.41 ; 2027.76,2989.57 ccw(c2027.76,3032.24) v1@2057.93,3002.07 ; U14.22@2063.43,2739.57 U14.21@2083.11,2739.57 ; v1@2069.57,2989.57 2140.43,2989.57 2179.8,2950.2 2229.8,2950.2 ; v1@2070,2990 2083.11,3003.11 U14.40@2083.11,3062.41 U14.41@2102.8,3062.41 ; v1@2072.07,3002.07 ccw(c2102.24,3032.24) 2102.24,2989.57 ; C79.1@2090.13,3135.17 cw(c2059.54,3104.58) 2102.8,3104.58 ; C79.1@2099.12,3144.16 2102.8,3140.48 U14.41@2102.8,3062.41 ; U14.20@2102.8,2739.57 U14.21@2083.11,2739.57 ; 2102.8,3122.33 cw(c2120.94,3122.33) C79.1@2108.11,3135.17 ; U14.42@2122.48,3062.41 U14.41@2102.8,3062.41 ; 2181.54,2587.96 ccw(c2231.96,2587.96) Q1.1@2196.3,2552.3 ; 2181.54,2612.1 ccw(c2256.1,2612.1) Q1.1@2203.37,2559.37 ; U14.16@2181.54,2739.57 2181.54,2630 ; Q1.1@2191,2547 2181.54,2556.46 2181.54,2630 ; U14.4@2293.74,2950.2 2229.8,2950.2 ; 2310,3120 2230,3120 2220.91,3110.91 U14.47@2220.91,3062.41 2220.91,2959.09 2229.8,2950.2 ; 1432.13,2517.88 ccw(c1418.96,2517.88) 1425.66,2529.21 cw(c1418.96,2517.88) 1432.13,2517.88 ; 1432.12,2517.88 cw(c1445.29,2517.88) 1438.59,2529.21 ccw(c1445.29,2517.88) 1432.12,2517.88 ; 1432.12,2517.88 1450,2500 1550,2500 v1(1570,2520) ; v1(1570,2520) v1@1577.84,2527.84 ; U14.21@2083.11,2739.57 2083.11,2636.89 2090,2630 2181.54,2630
  Bottom Layer w16: v3@1833.49,941.51 cw(c1853.97,921.03) 1853.97,950 cw(c1853.97,978.97) v3@1833.49,958.49 ; v3@1835,950 1880,950 1905,975 1905,1005 ; v2@1892.98,1062.98 cw(c1863.96,1033.96) 1905,1033.96 cw(c1946.04,1033.96) v2@1917.02,1062.98 ; 1905,1025 1905,1005 ; v2@1910,1080 v2(1905,1075) 1905,1005